# Altium PCB MAGIsCM4Core-AutoRoute2.PcbDoc
Units mil, origin at the board's own origin, x right, y up, seen from the top; angles counter-clockwise.
Board outline 6000 x 4000 mil, 4 copper layers (Component Side, Ground Plane, Signal Layer 1, Solder Side), stack 33.234 mil thick; 33 components, 65 nets, 187 pads, 80 vias.
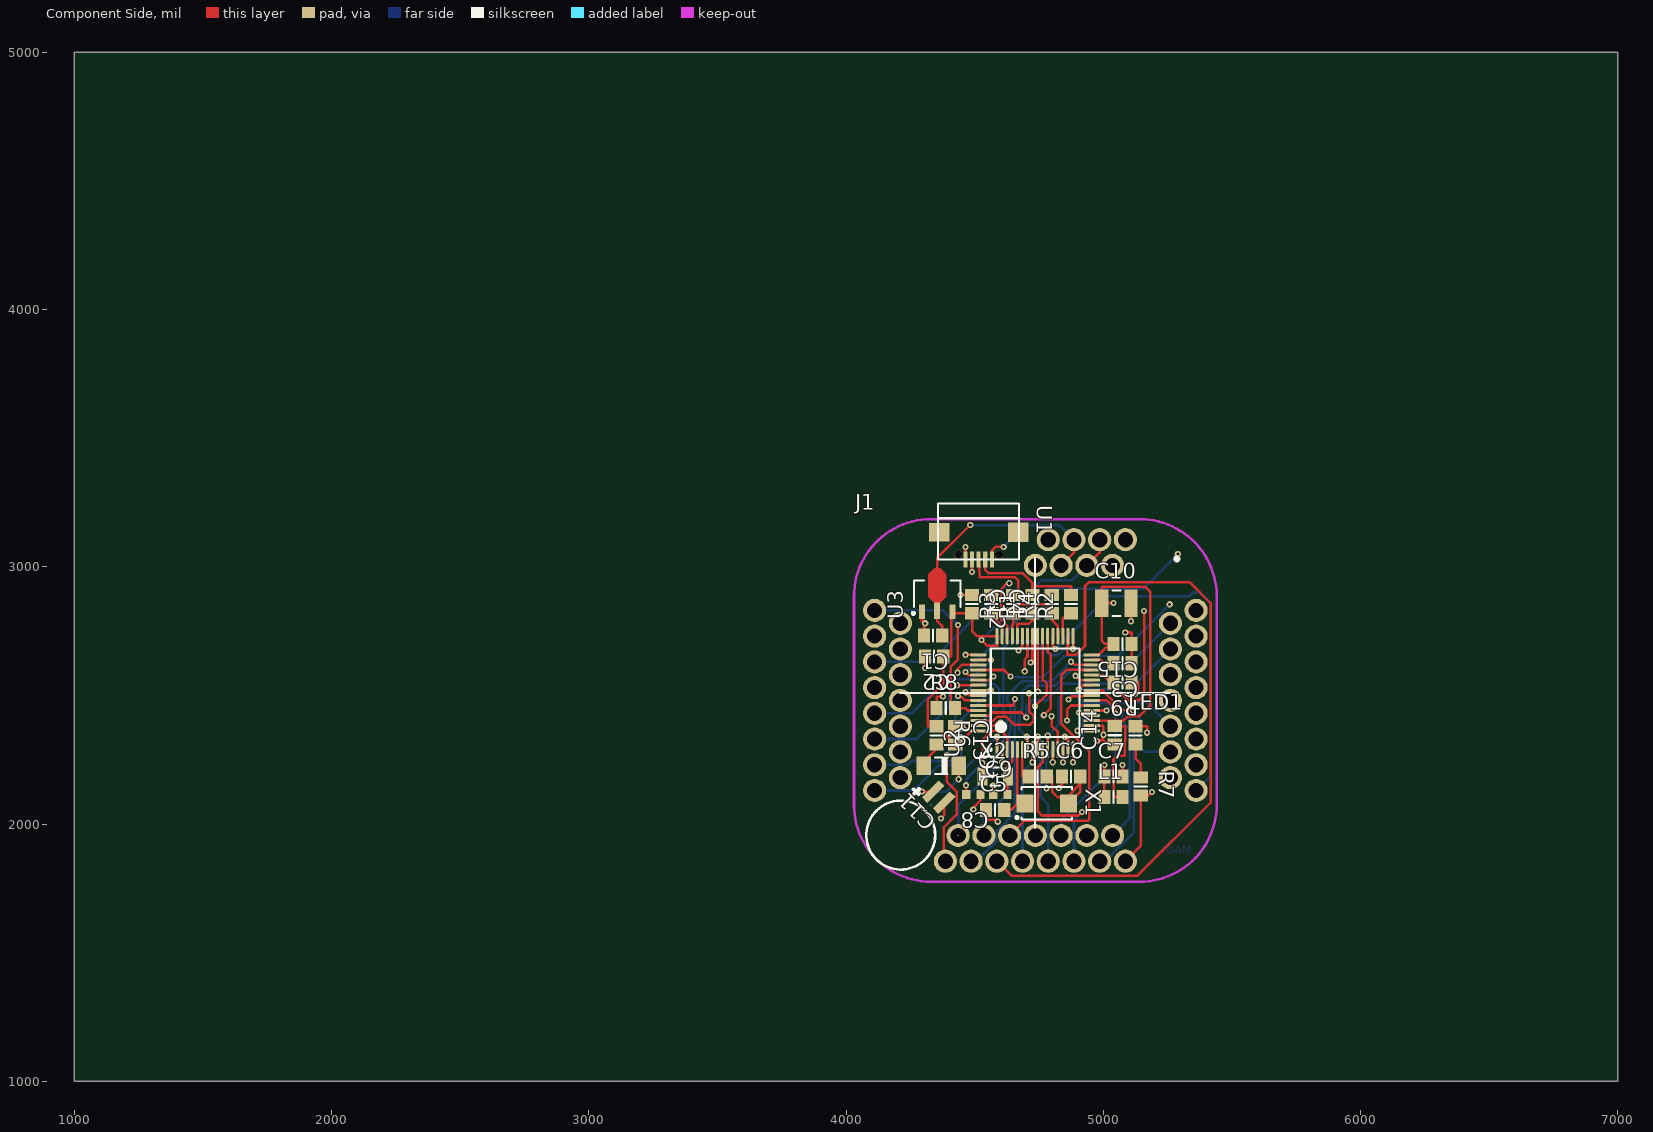
[diagram p0: Component Side view]
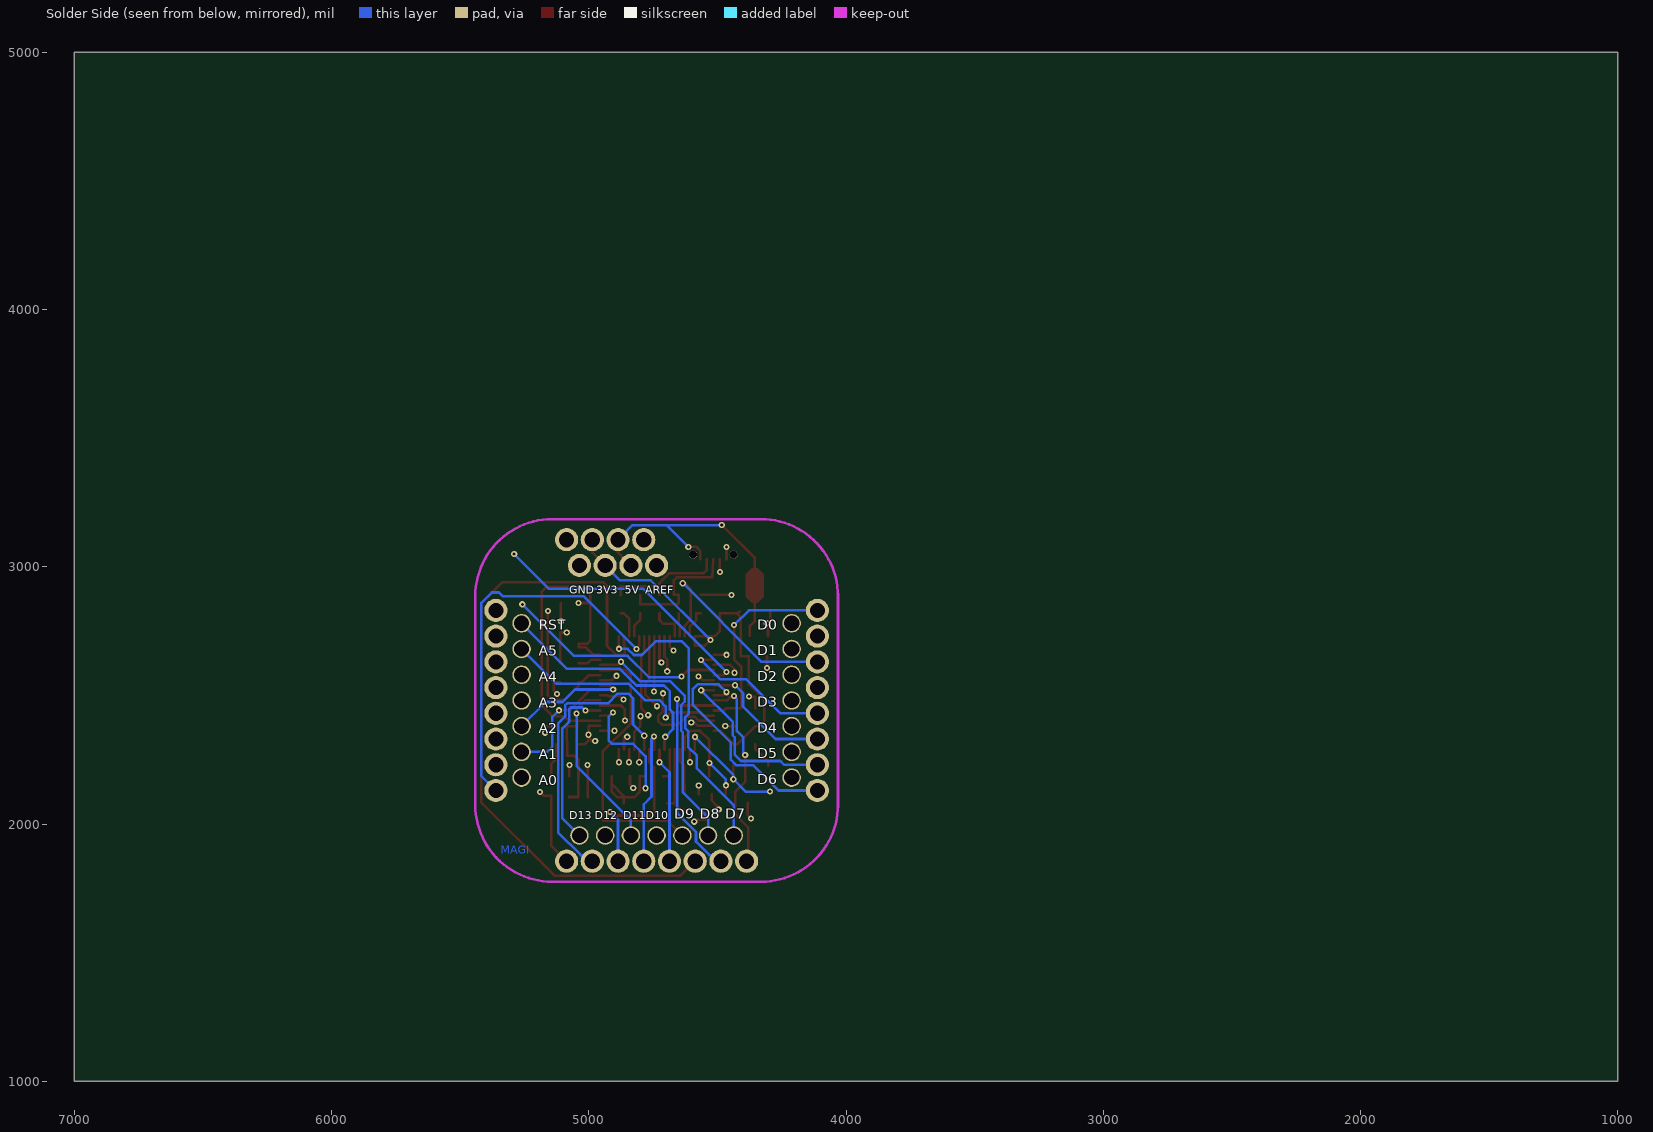
[diagram p1: Solder Side view, seen from below]
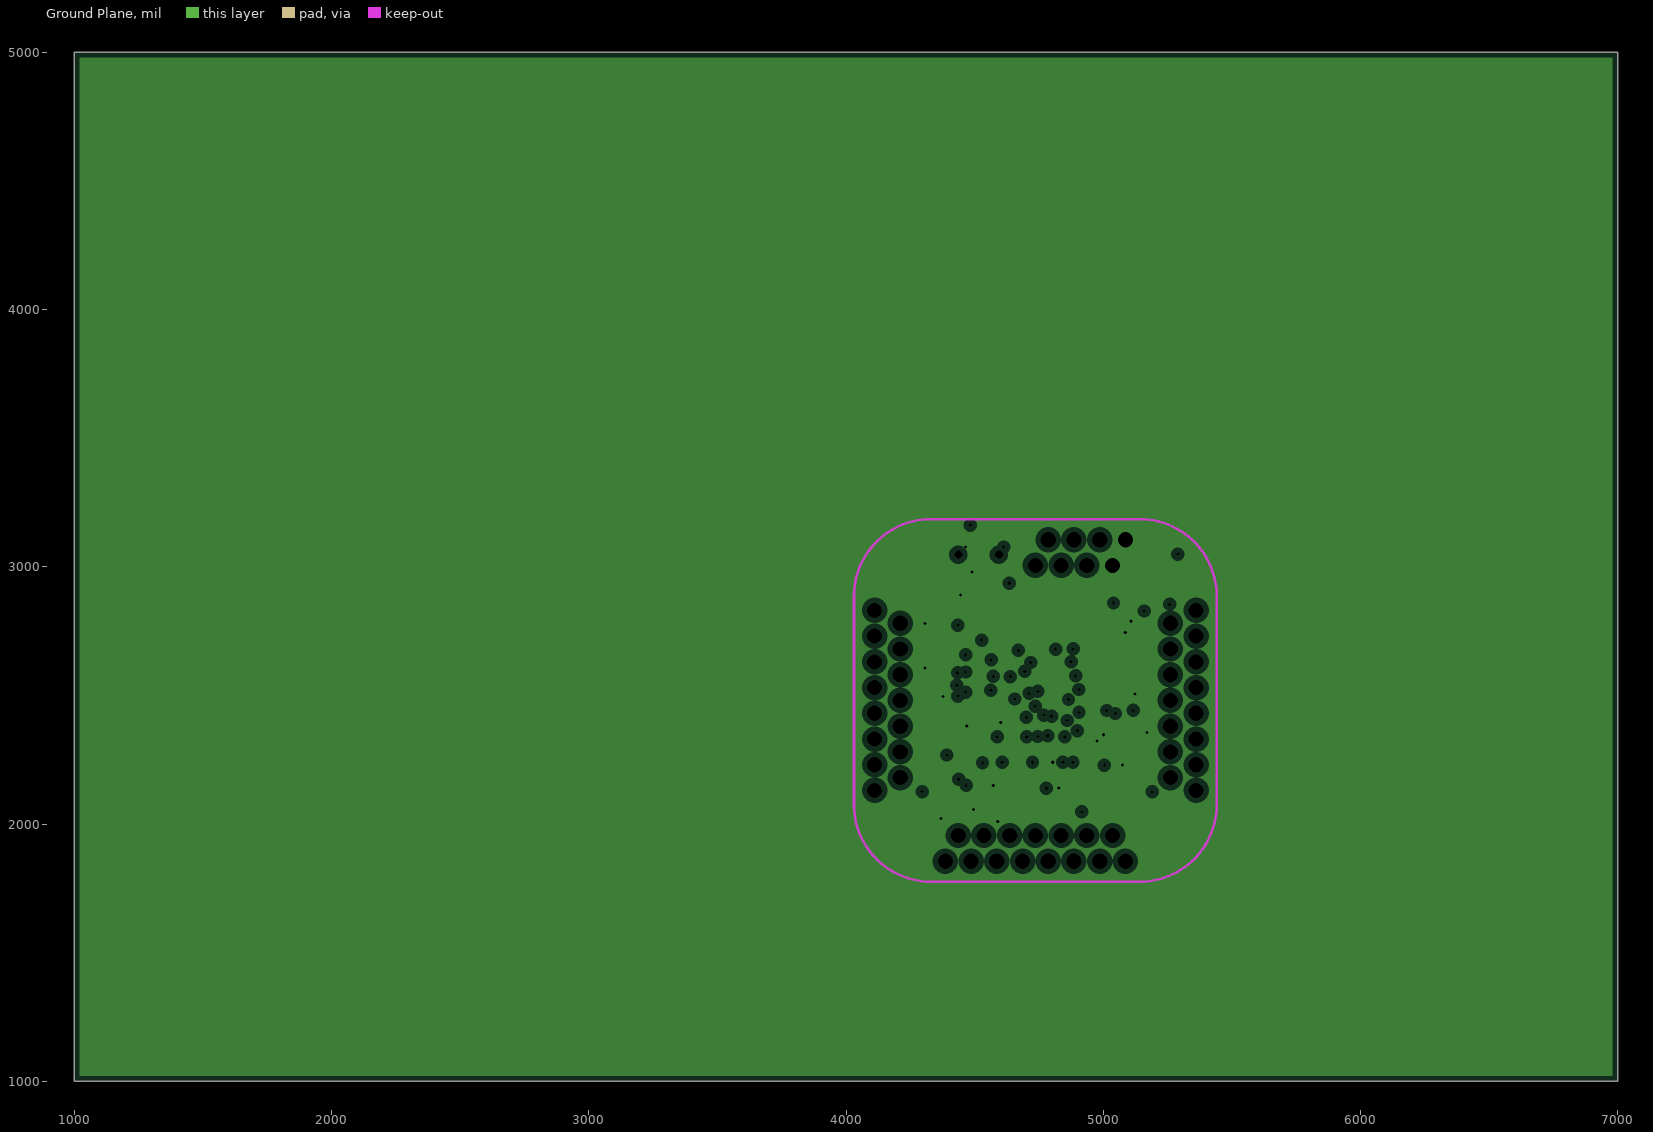
[diagram p2: Ground Plane, clearances drawn from the general rule]
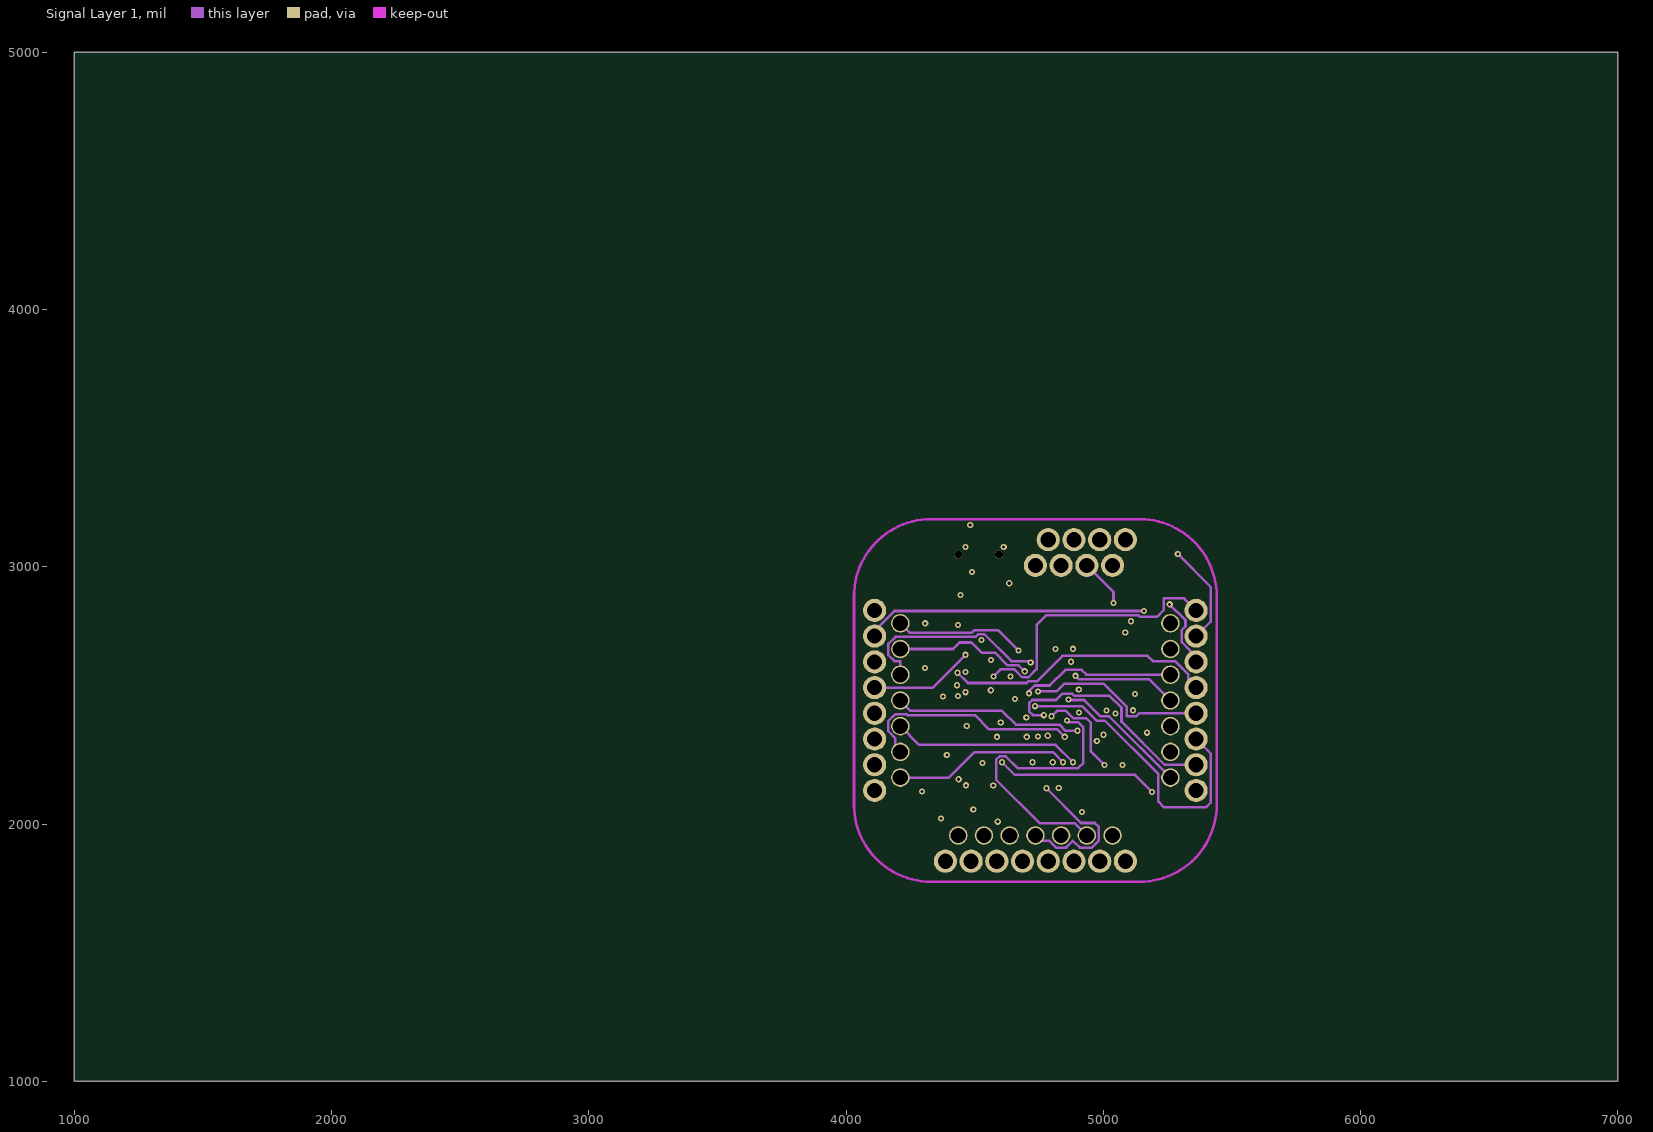
[diagram p3: Signal Layer 1]

## Layer stack, top to bottom
Top Solder: solder mask 0.4, Solder Resist, Dk 3.5
Component Side: signal copper 1.4
Dielectric 1: core 12.6, FR-4, Dk 4.8
Ground Plane: plane copper 1.417, net GND
Dielectric 3: prepreg 5, Dk 4.2
Signal Layer 1: signal copper 1.417
Dielectric 4: core 10, Dk 4.2
Solder Side: signal copper 1.4
Bottom Solder: solder mask 0.4, Solder Resist, Dk 3.5

## Board outline
1000,1000 7000,1000 7000,5000 1000,5000

## Design rules (kind name [scope] priority, off if disabled: settings)
Clearance [All] p1: gap=6
PlaneClearance [All] p1: clearance=20
PlaneConnect [All] p1: planeconnectstyle=Relief reliefexpansion=20 reliefentries=4 reliefconductorwidth=10 reliefairgap=10
PolygonConnect [All] p1: connectstyle=Relief reliefconductorwidth=10 reliefentries=4 polygonreliefangle="90 Angle" airgapwidth=10
RoutingVias [All] p1: holewidth=12 width=24 viastyle="Through Hole" minholewidth=12 minwidth=24 maxholewidth=280 maxwidth=500
SolderMaskExpansion [All] p1: expansion=4
Width [All] p1: maxlimit=100 minlimit=6 preferedwidth=10
27 further rules are at their usual default settings.

## Components (designator, comment, footprint, x,y, rotation, side; value= is the part's Value field where it differs from the comment)
C1 "10uf" 6-0805_n 4338.58,2732.28 r180 top
C2 "10uf" 6-0805_n 4342.52,2651.57 r180 top
C3 "CAP" 6-0805_N 5075,2625 r180 top
C4 "CAP" 6-0805_N 4565,2855 r270 top
C5 "15PF" 6-0805_n 4580,2055 r0 top
C6 "15PF" 6-0805_n 4875,2185 r0 top
C7 "CAP" 6-0805_N 5040,2185 r0 top
C8 "15PF" 1608[0603] 4495,2115 r180 top
C9 "15PF" 1608[0603] 4600,2115 r0 top
C10 "10uf" C1210_N 5051.18,2858.27 r0 top
C11 "10uf" 3.3V0.2F-RK 4360.24,2104.33 r135 top
C12 "CAP" 6-0805_N 4490,2855 r270 top
C13 "CAP" 6-0805_N 4425,2345 r270 top
C14 "CAP" 6-0805_N 5045,2345 r90 top
C15 "CAP" 6-0805_N 5075,2700 r180 top
D1 "SOD123" LL34 4370.08,2226.38 r0 top
J1 "MAGIsBoard-2x" MAGIsBoard-2x 4736.22,2480.32 r0 top
L1 "INDUCTOR" 6-0805_n 5040,2105 r0 top
LED1 "LED_3" 6-0805_N 5125.98,2344.49 r90 top
R1 "10K" 6-0805_n 4725,2855 r90 top
R2 "10K" 6-0805_n 4875,2854.57 r90 top
R3 "10K" 6-0805_n 4650,2855 r90 top
R4 "10K" 6-0805_n 4800,2854.57 r90 top
R5 "10K" 6-0805_n 4745,2185 r0 top
R6 "10K" 6-0805_n 4352.36,2344.49 r270 top
R7 "RES1_1" 6-0805_N 5145.67,2145.67 r270 top
R8 "RES1_1" 6-0805_N 4387.8,2450.79 r0 top
R9 "RES1_1" 6-0805_N 5075,2550 r180 top
U1 "USB" microUSB 4515.75,3051.18 r0 top
U2 "STM32F415RG" STM32F415RG 4735,2510 r90 top
U3 "HS7333" HS7333 4354.33,2895.67 r90 top
X1 "8M" 5032 4790,2080 r270 top
X2 "32.768k" 3215 4580,2185 r0 top

## Footprints (in the part's own frame and the unit in brackets; to place one, negate y for a bottom-side part, rotate by r counter-clockwise, add the part's x,y. Pads: shape width x height; smd on the part's side, far side on the other; paste and mask are expansions set on the pad)
3.3V0.2F-RK [mm]
  rect 0.8x2.4 smd: 1(0.762,0) 2(-0.762,0)
  silkscreen extent -3.4,0.8 3.4,8.7
6-0805_n [mm] "Chip Resistor, Body 2.0x1.2mm, IPC Medium Density"
  rect 1.2x1.4 smd: 1(-0.9,0) 2(0.9,0)
  silkscreen extent 0,-0.6 0,0.6, body extent -1.07,-0.7 1.07,0.7, height 0.7
6-0805_N [mm] "Chip Resistor, Body 2.0x1.2mm, IPC Medium Density"
  rect 1.2x1.4 smd: 1(-0.9,0) 2(0.9,0)
  silkscreen extent 0,-0.6 0,0.6, body extent -1.07,-0.7 1.07,0.7, height 0.7
1608[0603] [mm] "Chip Capacitor, Body 1.6x0.8mm, IPC High Density"
  rect 0.8x0.9 smd: 1(-0.7,0) 2(0.7,0)
  body extent -0.87,-0.48 0.87,0.48, height 1.3
3215 [mm]
  rect 1x1.8 smd: 1(-1.25,0) 2(1.25,0)
  silkscreen extent -0.45,-0.9 0.45,0.9
5032 [mm]
  rect 1.8x1.7 smd: 1(0,-2.404) 2(0,1.896)
  silkscreen extent -1.6,-3.3 1.6,2.25
C1210_N [mm] "Chip Capacitor, Body 3.2x2.5mm, IPC Medium Density"
  rect 1.3x2.7 smd: 1(-1.45,0) 2(1.45,0)
  silkscreen extent -0.4,-1.25 0.4,1.25, body extent -1.7,-1.35 1.7,1.35, height 1.5
HS7333 [mm] "SOT89, 3-Leads, Body 4.50x2.50mm, Pitch 1.50mm, Lead Span 4.1mm, IPC Medium Density"
  rect 1.4x0.6 smd: 1(-1.8,1.5) 3(-1.8,-1.5)
  rect 1.6x0.6 smd: 2(-1.7,0)
  Component Side region: -0.9,0.3 -0.3,0.9 1.9,0.9 2.5,0.3 2.5,-0.3 1.9,-0.9 -0.3,-0.9 -0.9,-0.3
  silkscreen extent -2.07,-2.3 1.3,2.47, body extent -1.3,-2.3 1.3,2.3, height 1.6
LL34 [mm] "MELF Diode, 2-Leads, Body 3.50x1.50mm, IPC Low Density"
  rect 1.45x1.8 smd: 1(-1.725,0) 2(1.725,0)
  silkscreen extent -0.6,-0.8 0.6,0.8, body extent -1.85,-0.77 1.85,0.77, height 1.53
MAGIsBoard-2x [mil]
  round 90 hole 59.06: 1(300,525) 1(350,625) 2(200,525) 2(250,625) 3(100,525) 3(150,625) 4(0,525) 4(50,625) 29(-625,350) 30(-625,250) 31(-625,150) 32(-625,50) 33(-625,-50) 34(-625,-150) 35(-625,-250) 36(-625,-350) 37(-350,-625) 38(-250,-625) 39(-150,-625) 40(-50,-625) 41(50,-625) 42(150,-625) 43(250,-625) 44(350,-625) 45(625,-350) 46(625,-250) 47(625,-150) 48(625,-50) 49(625,50) 50(625,150) 51(625,250) 52(625,350)
  round 90 / inner round 72 / far side round 72 hole 59.06: 8(-525,300) 9(-525,200) 10(-525,100) 11(-525,0) 12(-525,-100) 13(-525,-200) 14(-525,-300) 15(-300,-525) 16(-200,-525) 17(-100,-525) 18(0,-525) 19(100,-525) 20(200,-525) 21(300,-525) 22(525,-300) 23(525,-200) 24(525,-100) 25(525,0) 26(525,100) 27(525,200) 28(525,300)
  Keep-Out Layer lines w10: -705,-415 -705,415 ; -705,-405 ccw(c-405,-405) -405,-705 ; -705,405 cw(c-405,405) -405,705 ; -425,705 425,705 ; -410,-705 415,-705 ; 405,-705 ccw(c405,-405) 705,-405 ; 405,705 cw(c405,405) 705,405 ; 705,-425 705,430
  silkscreen extent 543,543 557,557
microUSB [mm]
  round 0.8 hole 0.8: 0(-2,-0.1) 0(2,-0.1)
  rect 0.4x1.6 smd: 1(1.3,-0.575) 2(0.65,-0.575) 3(0,-0.575) 4(-0.65,-0.575) 5(-1.3,-0.575)
  rect 2x1.8 smd: 6(-3.9,2.099)
  rect 2x1.9 smd: 7(3.9,2.099)
  silkscreen extent -4,-0.58 4,4.92, body extent -4.1,-0.68 4.1,5.02, height 3
STM32F415RG [mm] "TSQFP, 64-Leads, Body 10.00x10.00mm, Pitch 0.50mm, IPC Medium Density"
  oval 1.65x0.3 smd: 1(-5.6,3.75) 2(-5.6,3.25) 3(-5.6,2.75) 4(-5.6,2.25) 5(-5.6,1.75) 6(-5.6,1.25) 7(-5.6,0.75) 8(-5.6,0.25) 9(-5.6,-0.25) 10(-5.6,-0.75) 11(-5.6,-1.25) 12(-5.6,-1.75) 13(-5.6,-2.25) 14(-5.6,-2.75) 15(-5.6,-3.25) 16(-5.6,-3.75) 33(5.6,-3.75) 34(5.6,-3.25) 35(5.6,-2.75) 36(5.6,-2.25) 37(5.6,-1.75) 38(5.6,-1.25) 39(5.6,-0.75) 40(5.6,-0.25) 41(5.6,0.25) 42(5.6,0.75) 43(5.6,1.25) 44(5.6,1.75) 45(5.6,2.25) 46(5.6,2.75) 47(5.6,3.25) 48(5.6,3.75)
  oval 0.3x1.65 smd: 17(-3.75,-5.6) 18(-3.25,-5.6) 19(-2.75,-5.6) 20(-2.25,-5.6) 21(-1.75,-5.6) 22(-1.25,-5.6) 23(-0.75,-5.6) 24(-0.25,-5.6) 25(0.25,-5.6) 26(0.75,-5.6) 27(1.25,-5.6) 28(1.75,-5.6) 29(2.25,-5.6) 30(2.75,-5.6) 31(3.25,-5.6) 32(3.75,-5.6) 49(3.75,5.6) 50(3.25,5.6) 51(2.75,5.6) 52(2.25,5.6) 53(1.75,5.6) 54(1.25,5.6) 55(0.75,5.6) 56(0.25,5.6) 57(-0.25,5.6) 58(-0.75,5.6) 59(-1.25,5.6) 60(-1.75,5.6) 61(-2.25,5.6) 62(-2.75,5.6) 63(-3.25,5.6) 64(-3.75,5.6)
  silkscreen extent -5.72,-4.37 4.37,4.57, body extent -5,-5 5,5, height 1.6

## Part data
C1 C2 C10 C11: library part "CAPACITOR POL", "Capacitor"
C3 C4 C7 C12 C13 C14 C15: library part CAP_1, "Capacitor"
C5 C6 C8 C9: library part CAP
D1: library part "DIODE SCHOTTKY_1", "Schottky Diode"
R1 R2 R3 R4 R5 R6: library part RES
X1 X2: library part CRYSTAL

## Via types
v1: diameter 24, hole 12, Component Side to Solder Side, 80 vias

## Nets (pads, with @x,y where several pads share a name; then routed paths per layer and width w, separated by ;. In a path a pad name is that pad's centre, name@x,y a point inside that pad or via, vN(x,y) a via of type N, cw(c..) or ccw(c..) an arc to the next point about the centre after c; other vN are vias at no path point)
3.3V: C2.1 C10.1 C12.2 C13.2 C14.2 C15.2 J1.2 L1.2 R6.1 U2.19 U2.32 U2.48 U2.64 U3.3 | length 3660.8
  Component Side w10: U3.3 U3.3@4425,2819.57 ; U2.64 4488,2362.36 4435.2,2309.57 C13.2 4423.36,2309.57 4353,2379.92 R6.1 4318,2379.92 4317,2380.92 4317,2483 4377.95,2543.95 C2.1 4408,2651.57 4409,2652.57 4409,2803.57 U3.3@4425,2819.57 ; v1(4527,2715) 4550,2692 4587.36,2693 U2.48@4587.36,2730 ; U2.48 U2.48@4587.36,2730 ; J1.2@4936.22,3005.32 4986.22,3055.32 J1.2@4986.22,3105.32 ; U2.19 C14.2@5045,2401.73 ; U2.32 4982,2657.64 5011,2686.64 5039.57,2686.64 C15.2 5006.59,2700 4994.09,2712.5 C10.1 C10.1@4994.09,2859 ; v1(5040,2859) C10.1@4994.09,2859 ; L1.2 5041,2105 5040,2250 5055,2265 5084,2265 5085,2379.43 C14.2 C14.2@5045,2401.73 ; U3.3@4425,2819.57 C12.2 4490,2750 4510,2730 U2.48@4587.36,2730 ; C10.1@4994.09,2859 4994.09,2922 4995.09,2923 5162.5,2923 5182,2903.5 5182,2460.72 5139.5,2418.22 5095.49,2418.22 5079,2401.73 C14.2@5045,2401.73
  Signal Layer 1 w10: J1.2@4936.22,3005.32 5040,2901.54 v1(5040,2859)
  Solder Side w10: v1(4527,2715) 4759,2947 4877.9,2947 J1.2@4936.22,3005.32
5V: C1.1 J1.3 U1.1 U3.2 | length 1244.8
  Component Side w10: C1.1 4374.02,2770 4354.33,2789.69 U3.2 4354.33,3033.33 v1(4483,3162) ; U1.1 4566.93,3062.5 4581.43,3077 v1(4613,3077) ; J1.3@4836.22,3005.32 4886.22,3055.32 J1.3@4886.22,3105.32
  Solder Side w10: v1(4483,3162) 4698,3162 ; v1(4613,3077) 4698,3162 ; J1.3@4886.22,3105.32 4829.54,3162 4698,3162
BOOT0: J1.29 R8.2 U2.60 | length 791.5
  Component Side w10: v1(4435,2773) 4435,2640 4408,2613 4408,2450.79 R8.2 4464,2450.79 4473.69,2441.1 U2.60
  Solder Side w10: J1.29 4377.68,2830.32 v1(4435,2773)
GND: C1.2 C2.2 C3.1 C4.1 C5.1 C6.1 C7.2 C8.1 C9.1 C10.2 C11.2 C12.1 C13.1 C14.1 C15.1 J1.1 LED1.2 R8.1 R9.1 U1.4 U1.5 U2.12 U2.18 U2.63 U3.1 | length 1534.2
  Component Side w10: U3.1 4295.28,2792.74 ; C1.2 4303.15,2780.85 4295.28,2788.72 4295.28,2792.74 ; v1(4307.09,2607.01) C2.2 ; v1(4307.78,2780.24) 4295.28,2792.74 ; R8.1 4352.36,2494 4353.71,2495.35 v1(4377.36,2495.35) ; v1(4368.95,2021.57) 4381.45,2034.07 C11.2 ; C13.1 v1(4469.56,2380.43) ; v1(4445.44,2890.43) C12.1 C4.1 ; U1.5 v1(4464.57,3077.02) ; v1(4490.16,2980.03) U1.4 ; v1(4495,2056.27) 4495,2064.75 4522.56,2092.31 C8.1 ; U2.63 4576.51,2382.05 4589.01,2394.55 v1(4601.51,2394.55) ; C5.1 4544.57,2017 4545.57,2016 4583,2016 v1(4590,2009) ; C9.1 v1(4572.44,2149.72) ; v1(4803.9,2240.05) U2.12 ; v1(4827.07,2140.44) 4839.57,2152.94 C6.1 ; U2.18 4999,2382.05 5000,2381.05 5000,2335 4987.5,2322.5 v1(4975,2322.5) ; v1(5000.44,2347.07) 5000.44,2325 5015.87,2309.57 C14.1 ; C7.2 v1(5075.43,2229.56) ; v1(5085.43,2744.56) 5109,2744.56 5110.43,2743.13 C15.1 5111,2700 5111,2625 C3.1 ; v1(5108.27,2788.12) C10.2 ; R9.1 5134.43,2550 5135.43,2549 5135.43,2517.94 v1(5122.93,2505.44) ; LED1.2 5169,2379.92 5170.54,2378.38 v1(5170.54,2354.92)
NetC3_2: C3.2 U2.31 | length 89.5
  Component Side w10: U2.31 4991,2637.95 5003.95,2625 C3.2
NetC4_2: C4.2 U2.47 | length 116.5
  Component Side w10: C4.2 4582.01,2819.57 4582.01,2793.54 4607.05,2768.49 U2.47
NetC6_2: C6.2 R5.2 X1.2 | length 361.1
  Component Side w10: R5.2 4802,2185 4802,2125 4822.95,2104.05 X1.2@4864.65,2104.05 ; X1.2 X1.2@4864.65,2104.05 ; C6.2 4910.43,2154.79 ; X1.2@4864.65,2104.05 4864.65,2109 4910.43,2154.79 ; X1.2@4864.65,2104.05 4889.49,2104.05 4910.43,2125 4910.43,2154.79
NetC7_1: C7.1 L1.1 U2.13 | length 630.3
  Component Side w10: v1(4799.5,2419) 4799.5,2381.5 4823.58,2357.42 U2.13 ; L1.1 C7.1 v1(5004.57,2229)
  Signal Layer 1 w10: v1(4799.5,2419) 4820.5,2440 4855,2440 4884,2411 4934.68,2411 4952,2393.68 4952,2281.57 v1(5004.57,2229)
NetD1_1: D1.1 R6.2 | length 103.5
  Component Side w10: D1.1 4302.17,2242 4352.36,2292.2 R6.2
NetLED1_1: LED1.1 R7.1 | length 136.1
  Component Side w10: LED1.1 5125.98,2254.69 5145.67,2235 R7.1
NRST: J1.28 U2.7 | length 931
  Component Side w10: v1(4702.51,2339) 4705.47,2336.04 U2.7
  Solder Side w10: v1(4702.51,2339) 4672.51,2369 4672.51,2432 4685,2444.49 4685,2516 4707.5,2538.5 4814.5,2538.5 4879,2603 5083.9,2603 J1.28
OSC32_IN: C8.2 U2.3 X2.1 | length 459.9
  Component Side w10: v1(4467,2150.44) 4467.44,2150 C8.2 ; X2.1 v1(4530.79,2237.43) 4530.79,2326 4566.79,2362 4603.78,2362 4626.73,2339.05 U2.3
  Solder Side w10: v1(4467,2150.44) 4467,2173.65 v1(4530.79,2237.43)
OSC32_OUT: C9.2 U2.4 X2.2 | length 182.3
  Component Side w10: C9.2 4627.56,2149 4629.21,2150.65 X2.2 4629.21,2228 4646.42,2245.21 U2.4
OSC_IN: C5.2 U2.5 X1.1 | length 300.7
  Component Side w10: C5.2 4642,2055 X1.1@4667,2080 ; U2.5 4666.1,2080 X1.1@4667,2080 ; X1.1 X1.1@4667,2080
OSC_OUT: R5.1 U2.6 | length 128.3
  Component Side w10: U2.6 4685.79,2185 R5.1
PA0: J1.14 U2.14 | length 738.4
  Component Side w10: v1(4843,2240) 4843.27,2240.27 U2.14
  Signal Layer 1 w10: J1.14 4400,2180.32 4498.68,2279 4804,2279 v1(4843,2240)
PA1: J1.13 U2.15 | length 946.4
  Component Side w10: v1(4850.45,2339) 4861.95,2339 4862.95,2338 U2.15
  Signal Layer 1 w10: J1.13 4191,2280.32 4191,2334.07 4164.22,2360.85 4164.22,2399.79 4191.75,2427.32 4235.68,2427.32 4240,2423 4501,2423 4556.26,2367.74 4821.72,2367.74 v1(4850.45,2339)
PA2: J1.12 U2.16 | length 779.1
  Component Side w10: v1(4882.64,2240) U2.16
  Signal Layer 1 w10: J1.12 4283.54,2308 4814.64,2308 v1(4882.64,2240)
PA3: J1.11 U2.17 | length 793.1
  Component Side w10: v1(4899.64,2362.36) U2.17
  Signal Layer 1 w10: J1.11 4251.54,2440 4605.92,2440 4660,2385.92 4829.58,2385.92 4853.14,2362.36 v1(4899.64,2362.36)
PA4: J1.18 U2.20 | length 1093.1
  Component Side w10: v1(4906,2434) 4917.85,2422.15 U2.20
  Signal Layer 1 w10: J1.18 4736.22,1935 4790.07,1935 4816.75,1908.32 4855.69,1908.32 4881.47,1934.1 4909,1908.32 4955.69,1908.32 4983.22,1935.85 4983.22,1987.5 4966.72,2004 4914,2004 v1(4779,2139)
  Solder Side w10: v1(4779,2139) 4779,2262.5 4829,2312.5 4910.5,2312.5 4923,2325 4923,2417 v1(4906,2434)
PA5: J1.21 U2.21 | length 658.5
  Component Side w10: U2.21 v1(5013,2441.1)
  Solder Side w10: v1(5013,2441.1) 5024.9,2453 5070,2453 5075.53,2447.47 5075.53,2398.78 5103,2371.31 5103,2022.1 J1.21
PA6: J1.20 U2.22 | length 1249.5
  Component Side w10: v1(4859.5,2402.5) 4859.5,2445.29 4875,2460.79 U2.22
  Signal Layer 1 w10: v1(4859.5,2402.5) 4867,2395 4903,2395 4923,2375 4923,2237.5 4902.5,2217 4667,2217 4621,2263 4597,2263 4584,2250 4584,2172 4753,2003 4888.54,2003 J1.20
PA7: J1.19 U2.23 | length 684.9
  Component Side w10: U2.23 5013.87,2480.47 5047.43,2446.91 v1(5047.43,2429.69)
  Solder Side w10: J1.19 4836.22,2013.61 5047.43,2224.82 v1(5047.43,2429.69)
PA8: J1.10 U2.41 | length 873.2
  Component Side w10: v1(4718,2628) 4725.16,2635.16 U2.41
  Signal Layer 1 w10: J1.10 4211.22,2632.78 4211,2633 4187.73,2633 4164.22,2656.51 4164.22,2699.79 4191.75,2727.32 4504,2727.32 4514.68,2738 4537.5,2738 4642.5,2633 4713,2633 v1(4718,2628)
PA9: J1.9 U2.42 | length 682
  Component Side w10: v1(4695,2593.5) 4695,2640.53 4705.47,2651 U2.42
  Signal Layer 1 w10: J1.9 4416.68,2680.32 4442,2705.64 4488,2705.64 4527.17,2666.47 4578.53,2666.47 4628,2617 4671.5,2617 v1(4695,2593.5)
PA10: J1.8 U2.43 | length 573.7
  Component Side w10: v1(4670.21,2674.79) 4685.79,2690.36 U2.43
  Signal Layer 1 w10: J1.8 4248.22,2743.32 4488,2743.32 4498.68,2754 4591,2754 v1(4670.21,2674.79)
PA11: R1.1 U2.44 | length 138.9
  Component Side w10: U2.44 4666.1,2777 4667.1,2778 4710.5,2778 4725,2792.5 R1.1
PA12: R3.1 U2.45 | length 90.6
  Component Side w10: U2.45 4646.42,2773 4650,2776.58 R3.1
PA13: J1.31 U2.46 | length 882.2
  Component Side w10: U2.46 4626.73,2771.44 4603.73,2794.44 4603.73,2912.97 4626.77,2936 v1(4634.5,2936)
  Solder Side w10: J1.31 4328.82,2630.32 v1(4634.5,2936)
PA14: J1.32 U2.49 | length 456
  Component Side w10: v1(4465,2657.64) U2.49
  Signal Layer 1 w10: J1.32 4337.68,2530.32 v1(4465,2657.64)
PA15: J1.33 U2.50 | length 588.3
  Component Side w10: U2.50 v1(4564,2637.95)
  Solder Side w10: J1.33 4255.32,2430.32 4388,2563 4489.05,2563 v1(4564,2637.95)
PB0: J1.24 U2.26 | length 472.6
  Component Side w10: v1(4905,2523) 4921.53,2539.53 U2.26
  Solder Side w10: v1(4905,2523) 5053,2523 5101.68,2474.32 5167.22,2474.32 J1.24
PB1: J1.25 U2.27 | length 478.3
  Component Side w10: v1(4892.5,2576) 4909.29,2559.21 U2.27
  Signal Layer 1 w10: v1(4892.5,2576) 4906.5,2562 5179.54,2562 J1.25
PB2: J1.30 R9.2 U2.28 | length 1687.3
  Component Side w10: U2.28 4999,2578.9 5027.9,2550 R9.2 5039.57,2536.57 5094.14,2482 5141,2482 5159,2500 v1(5159,2828)
  Signal Layer 1 w10: J1.30 4111.22,2751 4188.22,2828 v1(5159,2828)
PB3: J1.34 U2.55 | length 520.2
  Component Side w10: v1(4431,2539.53) U2.55
  Solder Side w10: J1.34 4273.32,2330.32 4400.36,2457.36 4400.36,2508.89 v1(4431,2539.53)
PB4: J1.35 U2.56 | length 690.4
  Component Side w10: U2.56 v1(4563,2519.84)
  Solder Side w10: J1.35 4240.32,2230.32 4255,2245 4408,2245 4432.05,2269.05 4432.05,2336.05 4441,2345 4441,2397.84 v1(4563,2519.84)
PB5: J1.36 U2.57 | length 927
  Component Side w10: v1(4465,2512.5) 4477.34,2500.16 U2.57
  Solder Side w10: J1.36 4262.32,2130.32 4361,2229 4427.05,2229 4448.05,2250 4448.05,2316.05 4595,2463 4595,2525 4577,2543 4495.5,2543 v1(4465,2512.5)
PB6: J1.37 U2.58 | length 791.7
  Component Side w10: J1.37 4380,1855.32 4380,1987 4431,2038 4431,2125 4392,2164 v1(4392,2268) ; v1(4435,2497) 4435,2493 4436,2492 4451,2492 4462.53,2480.47 U2.58
  Solder Side w10: v1(4392,2268) 4399,2275 4399,2336.36 4424,2361.37 4424,2486 v1(4435,2497)
PB7: J1.38 U2.59 | length 888.4
  Component Side w10: U2.59 4650,2460.79 v1(4656.51,2485.79)
  Solder Side w10: J1.38 4486.22,1879 4530.71,1879 4583.22,1931.51 4583.22,1968.79 4656.51,2042.08 v1(4656.51,2485.79)
PB8: J1.27 U2.61 | length 894.9
  Component Side w10: U2.61 4556.73,2421.42 4568.86,2433.55 4681.92,2433.55 v1(4701.05,2414.42)
  Solder Side w10: v1(4701.05,2414.42) 4701.05,2457.23 4725,2481.18 4781.28,2481.18 4846.09,2546 5126.9,2546 J1.27
PB9: J1.26 U2.62 | length 956.6
  Component Side w10: U2.62 4572.73,2401.73 4588.55,2417.55 4622.45,2417.55 4654,2386 4716,2386 4730,2400 4730,2419.42 4712,2437.42 v1(4712,2508)
  Signal Layer 1 w10: v1(4712,2508) 4712,2517.59 4732.91,2538.5 4792,2538.5 4852.5,2599 4916,2599 4934.68,2580.32 J1.26
PB10: J1.17 U2.29 | length 1068.7
  Component Side w10: J1.17 4692.9,2012 4940,2012 4946,2018 4946,2282 4836.5,2391.5 4836.5,2577.5 4858,2599 4912,2599 4912.42,2598.58 U2.29
PB11: J1.16 U2.30 | length 980.7
  Component Side w10: v1(4874.94,2630.77) 4887.44,2618.27 U2.30
  Solder Side w10: J1.16 4536.22,2025.22 4634.13,2123.13 4634.13,2355.55 4640.51,2361.93 4640.51,2461.78 4627,2475.29 4627,2499 4682.5,2554.5 4798.68,2554.5 v1(4874.94,2630.77)
PB12: J1.15 U2.33 | length 1176.8
  Component Side w10: U2.33 4882.64,2681.36 v1(4883,2681)
  Solder Side w10: J1.15 4436.22,2072.22 4580,2216 4580,2266 4614,2300 4614,2361.04 4624.51,2371.55 4624.51,2416.54 4611,2430.05 4611,2683 4639,2711 4739,2711 4793,2657 4824.91,2657 4848.91,2681 v1(4883,2681)
PB13: J1.39 U2.34 | length 2665.3
  Component Side w10: J1.39 4642.54,1799 5134,1799 5418,2083 5418,2858 5337,2939 4943,2939 4929,2925 4929,2692.01 4894.99,2658 4861,2658 4860,2659 4860,2690.05 4862.95,2693 U2.34
PB14: R2.1 U2.35 | length 108.5
  Component Side w10: U2.35 4843.27,2798.77 4863.64,2819.13 R2.1
PB15: R4.1 U2.36 | length 98.4
  Component Side w10: R4.1 4800,2793.95 4823.58,2770.37 U2.36
PC0: J1.40 U2.8 | length 450.3
  Component Side w10: v1(4725,2240) 4725.16,2240.16 U2.8
  Solder Side w10: J1.40 4686.22,2201.22 v1(4725,2240)
PC1: J1.41 U2.9 | length 552.3
  Component Side w10: U2.9 4744.84,2338.84 v1(4746,2340)
  Solder Side w10: v1(4746,2340) 4756,2330 4756,2106.22 4786.22,2076 J1.41
PC2: J1.42 U2.10 | length 636.9
  Component Side w10: U2.10 4764.53,2239.53 4745,2220 4745,2050 4762,2033 4903,2033 v1(4917,2047)
  Solder Side w10: J1.42 4886.22,2016.22 v1(4917,2047)
PC3: J1.43 U2.11 | length 1206.1
  Component Side w10: U2.11 v1(4784.21,2343)
  Solder Side w10: v1(4784.21,2343) 4828,2386.79 4828,2488.79 4846.21,2507 4888.05,2507 4926.05,2469 5084.37,2469 5091.53,2461.84 5091.53,2418.22 5119,2390.75 5119,1967.29 5030.71,1879 4986.22,1879 J1.43
PC4: J1.22 U2.24 | length 619.2
  Component Side w10: v1(4865,2484) 4878,2497 4922.84,2497 4926,2500.16 U2.24
  Signal Layer 1 w10: v1(4865,2484) 4867,2482 4926.1,2482 4990,2418.1 5023.43,2418.1 J1.22
PC5: J1.23 U2.25 | length 472.9
  Component Side w10: U2.25 4997.16,2519.84 5075,2442 v1(5116,2442)
  Solder Side w10: v1(5116,2442) 5142,2416 5142,2300 5161.68,2280.32 J1.23
PC6: J1.45 U2.37 | length 1518.4
  Component Side w10: U2.37 4803.9,2691.1 v1(4815,2680)
  Solder Side w10: v1(4815,2680) 5021,2886 5335,2886 5349,2900 5377,2900 5418,2859 5418,2187.1 J1.45
PC7: J1.46 U2.38 | length 1229.9
  Component Side w10: v1(4769,2423) 4796.42,2450.42 4796.42,2658.58 4784.21,2670.79 U2.38
  Signal Layer 1 w10: v1(4769,2423) 4727,2423 4712,2438 4712,2470 4724,2482 4817.05,2482 4842.05,2507 4879,2507 4888,2498 5025,2498 5071,2452 5071,2398 5238.68,2230.32 J1.46
PC8: J1.47 U2.39 | length 1484.3
  Component Side w10: v1(4735,2458) 4780.42,2503.42 4780.42,2545.58 4764.53,2561.47 U2.39
  Signal Layer 1 w10: v1(4735,2458) 4918.1,2458 4974,2402.1 5005.9,2402.1 5214,2194 5214,2087.5 5236.5,2065 5400,2065 5418,2083 5418,2273.54 J1.47
PC9: J1.48 U2.40 | length 921.6
  Component Side w10: U2.40 4744.84,2516.66 v1(4746,2515.5)
  Signal Layer 1 w10: v1(4746,2515.5) 4818.55,2515.5 4849.05,2546 5000.68,2546 5092,2454.68 5092,2419.22 5127.4,2418.22 5139.5,2430.32 J1.48
PC10: J1.49 U2.51 | length 1170.6
  Component Side w10: v1(4434,2588) 4434,2602.27 4450,2618.27 U2.51
  Signal Layer 1 w10: v1(4434,2588) 4474,2548 4702,2548 4708.5,2554.5 4742.5,2554.5 4841.77,2653.77 5172.23,2653.77 5193,2633 5279.34,2633 5330,2582.34 5330,2530.32 J1.49
PC11: J1.50 U2.52 | length 1152.2
  Component Side w10: U2.52 4613.42,2598.58 v1(4639,2573)
  Signal Layer 1 w10: v1(5258.34,2854) 5319.93,2792.41 5319.93,2768.22 5305.22,2753.51 5305.22,2707.12 5338,2674.34 5338,2653.54 J1.50
  Solder Side w10: v1(4639,2573) 4639,2571.5 4640,2570.5 4766.1,2570.5 4849.36,2653.77 5058.11,2653.77 v1(5258.34,2854)
PC12: J1.51 U2.53 | length 1464.5
  Component Side w10: v1(4465,2591) 4477.1,2578.9 U2.53
  Signal Layer 1 w10: v1(5290,3049) 5418,2921 5418,2787.1 J1.51
  Solder Side w10: v1(4465,2591) 4788,2914 5155,2914 v1(5290,3049)
PC13: J1.44 R7.2 U2.2 | length 1010.1
  Component Side w10: v1(4607.05,2240) U2.2 ; J1.44 5145.67,1914.77 R7.2 5175.24,2110.24 v1(5190,2125)
  Signal Layer 1 w10: v1(4607.05,2240) 4656.05,2191 5124,2191 v1(5190,2125)
PD2: J1.52 U2.54 | length 1155.3
  Component Side w10: U2.54 4558,2559.21 v1(4572.79,2574)
  Signal Layer 1 w10: v1(4572.79,2574) 4599.79,2601 4654.5,2601 4685,2570.5 4709.5,2570.5 4741,2602 4741,2773 4780,2812 5136,2812 5143,2805 5209,2805 5235,2831 5235,2876 5236,2877 5314.54,2877 J1.52
USBDM: R1.2 R2.2 U1.2 | length 476.7
  Component Side w10: U1.2 4541.34,2987.5 4553.84,2975 4686.5,2975 4725,2936.5 4725,2924 ; R1.2 4725,2924 ; R2.2 4875,2924 4874,2925 4726,2925 4725,2924
USBDP: R3.2 R4.2 U1.3 | length 518.8
  Component Side w10: U1.3 4519.25,2959 4657,2959 4670,2946 4670,2890.43 R3.2 4650,2859 4654,2855 4799,2855 4800,2856 R4.2
VBAT: C11.1 D1.2 U2.1 | length 534.1
  Component Side w10: v1(4295.88,2126) 4296.34,2125.54 C11.1 ; v1(4437.99,2173.94) D1.2 ; U2.1 v1(4587.36,2339)
  Solder Side w10: v1(4295.88,2126) 4390.05,2126 v1(4437.99,2173.94) 4437.99,2189.63 v1(4587.36,2339)
pads on no net: J1.4 U1.0 U1.6 U1.7

## Polygon pours and split planes (outlines as drawn)
GND on Ground Plane (split plane): 6979.9,1020.1 1020.1,1020.1 1020.1,4979.9 6979.9,4979.9

## Silkscreen, mask and mechanical layers (free items; w line width, h text height)
Top Overlay:
  lines w3: 4328.74,2074.8 4330.71,2074.8 ; 4335.63,1903.14 cw(c4338.99,1903.14) 4336.61,1905.51 ; 4435.04,1955.32 4436.22,1955.32 ; 4330.71,2074.8 4330.71,2074.8
  lines w8: 4210,2510 5260,2510 ; 4735,1985 4735,3035
Mechanical 15:
  lines w8: 2230,1985 2980,1985

## Text inside footprints (layer, text, board x,y; h text height)
J1: Bottom Overlay "AREF" at 4780.79,2895.16 h31.5; Bottom Overlay "5V" at 4860.79,2895.16 h31.5; Bottom Overlay "3V3" at 4970.79,2895.16 h31.5; Bottom Overlay "GND" at 5075.79,2895.16 h31.5; Bottom Overlay "RST" at 5195.2,2755.39 h39.37; Bottom Overlay "A5" at 5195.2,2654.56 h39.37; Bottom Overlay "A4" at 5195.2,2553.73 h39.37; Bottom Overlay "A3" at 5195.2,2452.89 h39.37; Bottom Overlay "A2" at 5195.2,2352.06 h39.37; Bottom Overlay "A1" at 5195.2,2251.23 h39.37; Bottom Overlay "A0" at 5195.2,2150.39 h39.37; Bottom Overlay "D13" at 5075.2,2018.27 h31.5; Bottom Overlay "D12" at 4976.2,2018.27 h31.5; Bottom Overlay "D11" at 4866.7,2018.27 h31.5; Bottom Overlay "D10" at 4778.19,2018.27 h31.5; Bottom Overlay "D9" at 4668.2,2020.39 h39.37; Bottom Overlay "D8" at 4569.2,2020.39 h39.37; Bottom Overlay "D7" at 4470.2,2020.39 h39.37; Bottom Overlay "D6" at 4345.2,2155.39 h39.37; Bottom Overlay "D5" at 4345.2,2255.39 h39.37; Bottom Overlay "D4" at 4345.2,2355.39 h39.37; Bottom Overlay "D3" at 4345.2,2455.39 h39.37; Bottom Overlay "D2" at 4345.2,2555.39 h39.37; Bottom Overlay "D1" at 4345.2,2655.39 h39.37; Bottom Overlay "D0" at 4345.2,2755.39 h39.37; Solder Side "MAGI" at 5341.22,1885.32 h31.5